# Altium PCB MCX_BNC_Adapter.PCBDOC
Units mm, origin at the board's own origin, x right, y up, seen from the top; angles counter-clockwise.
Board outline 34 x 94 mm, 2 copper layers (TopLayer, BottomLayer), stack 1.571 mm thick; 24 components, 16 nets, 58 pads, 0 vias.
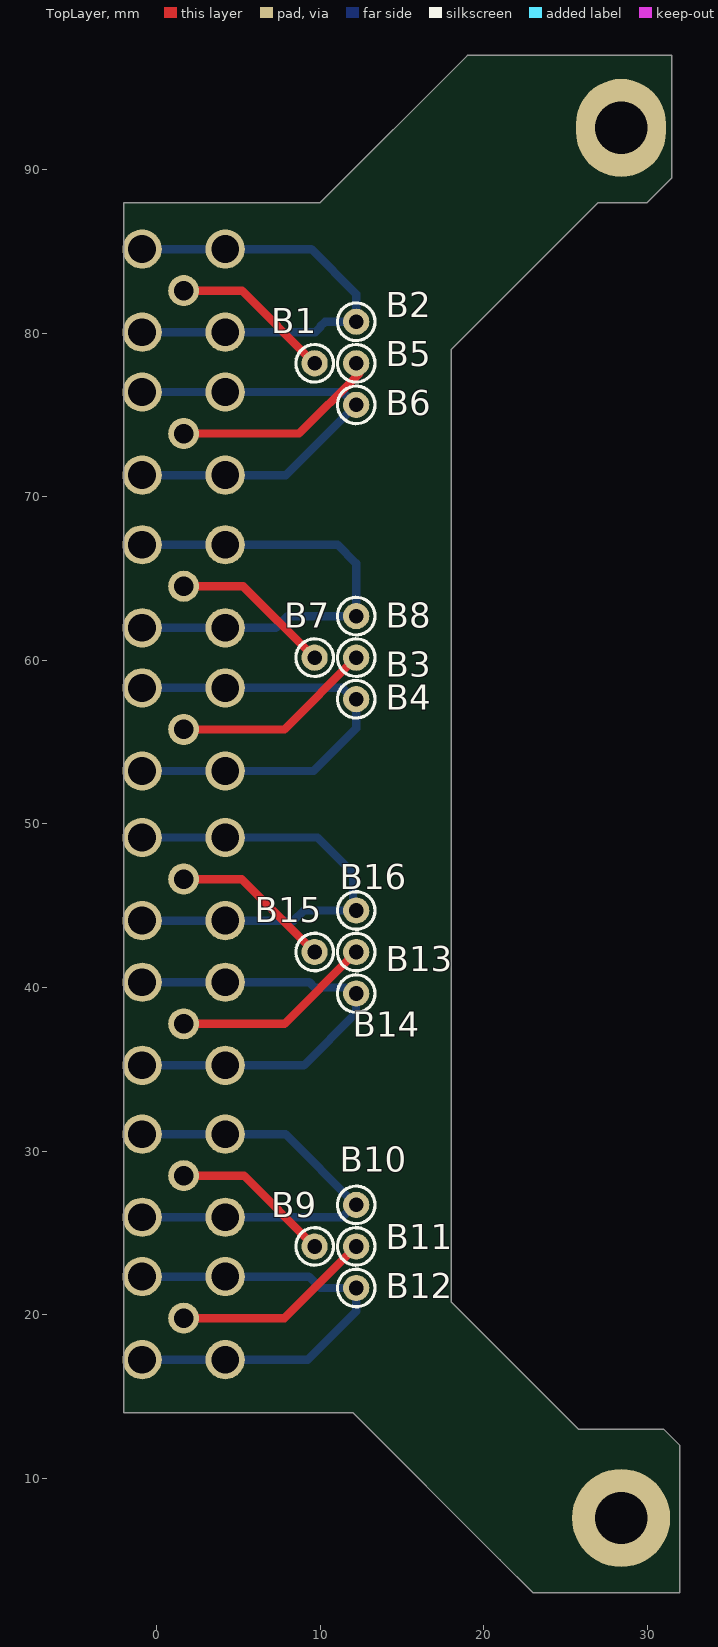
[diagram p0: TopLayer view]
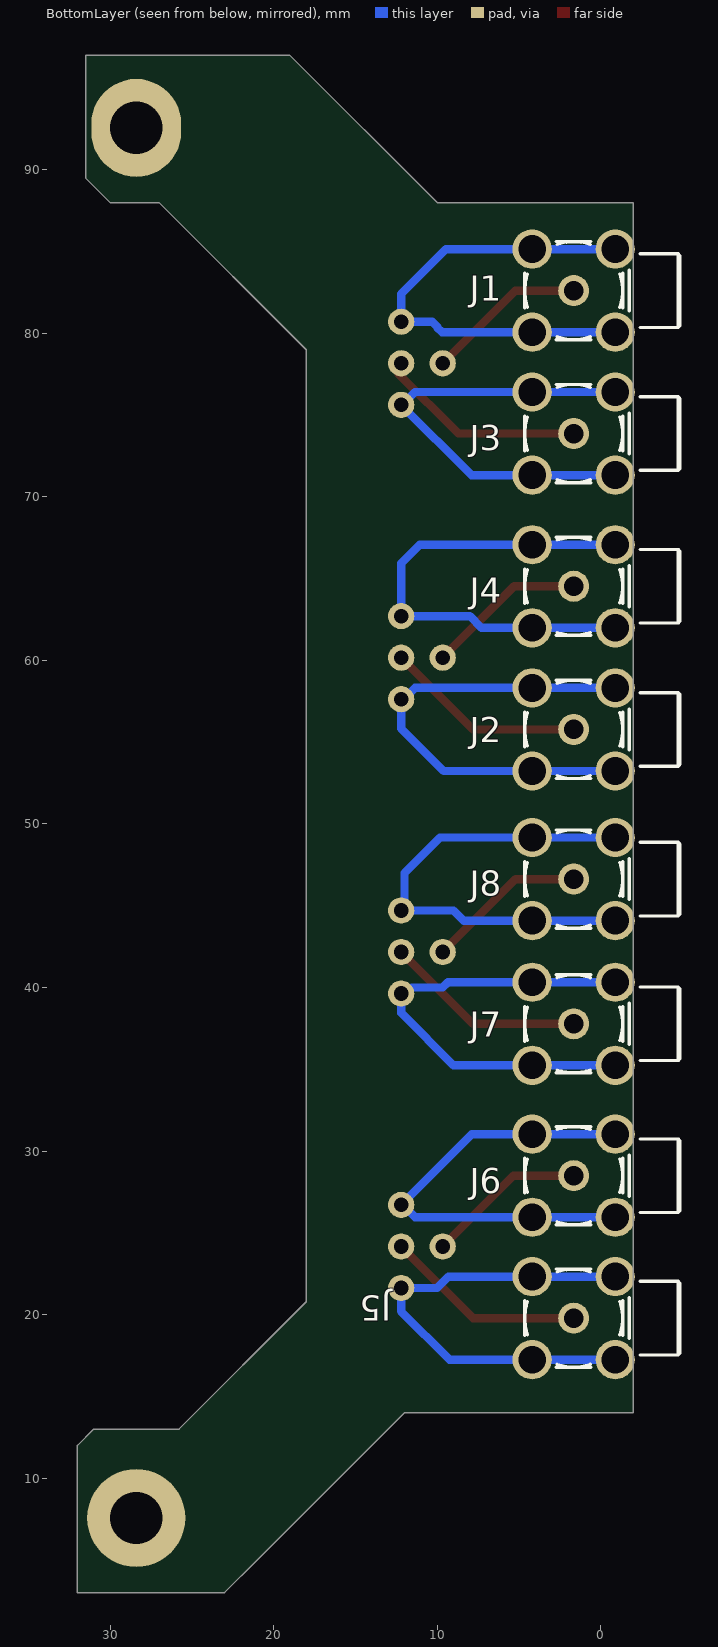
[diagram p1: BottomLayer view, seen from below]
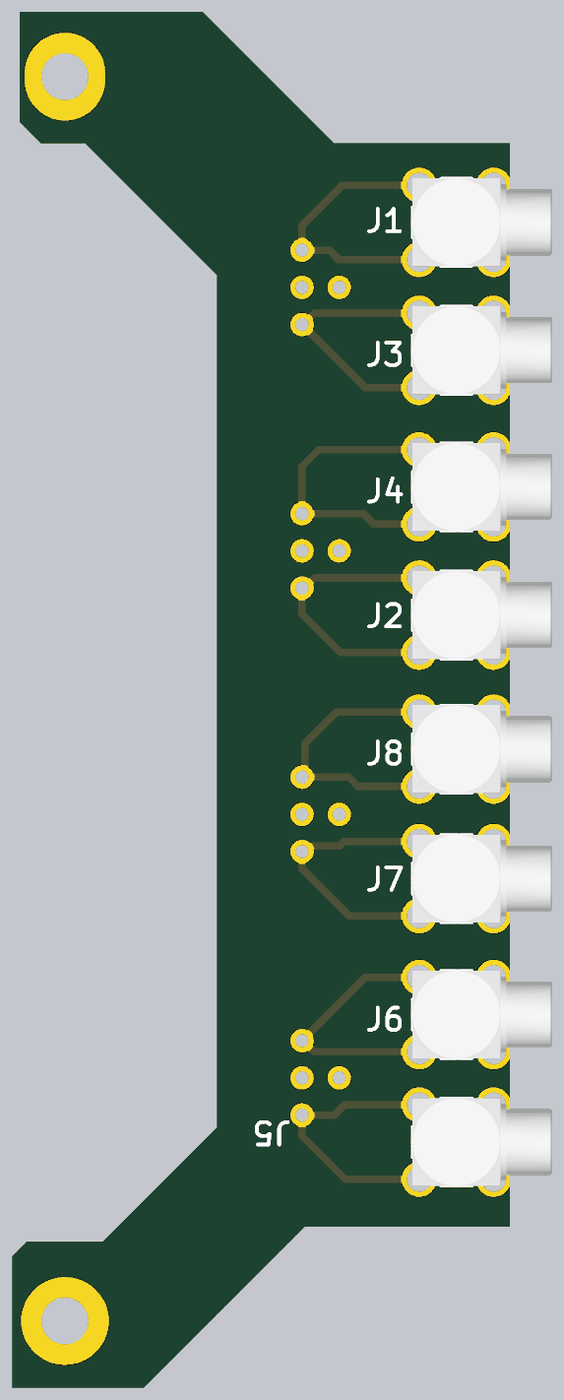
[diagram p2: 3D render of the assembled board from below, using the file's embedded part models]

## Layer stack, top to bottom
TopSolder: solder mask 0.0102, Solder Resist, Dk 3.5
TopLayer: signal copper 0.0356
Dielectric2: dielectric 1.5, FR-4, Dk 4.8
BottomLayer: signal copper 0.0356
BottomSolder: solder mask 0.0102, Solder Resist, Dk 3.5

## Board outline
-2,14 12,14 21,5 23,3 32,3 32,12 31,13 25.783,13 18,20.783 18,79 27,88 30,88 31.5,89.5 31.5,97 19,97 10,88 -2,88

## Design rules (kind name [scope] priority, off if disabled: settings)
Clearance Clearance_DIFF [(InDifferentialPairClass('All Differential Pairs')and IsTrack ) vs (InDifferentialPairClass('All Differential Pairs') and IsTrack  )] p1 off: gap=0.508 ignorepadtopadclearanceinfootprint=FALSE except(0: Arc-Hole Track-Hole SMDPad-Hole THPad-Hole Via-Hole Fill-Hole Poly-Hole Region-Hole Text-Hole; 0.127: SMDPad-SMDPad SMDPad-THPad SMDPad-Via SMDPad-Fill SMDPad-Poly SMDPad-Region SMDPad-Text THPad-THPad THPad-Via THPad-Fill THPad-Poly THPad-Region THPad-Text Via-Via Via-Fill Via-Poly Via-Region Via-Text)
Clearance [All] p2: gap=0.127 ignorepadtopadclearanceinfootprint=FALSE except(0: Arc-Hole Track-Hole SMDPad-Hole THPad-Hole Via-Hole Fill-Hole Poly-Hole Region-Hole Text-Hole; 0.381: Arc-Poly Track-Poly SMDPad-Poly THPad-Poly Via-Poly Fill-Poly Poly-Poly)
ComponentClearance [All] p1: gap=0 collisioncheckmode=3 verticalgap=2540 showdistances=FALSE
DiffPairsRouting [All] p1: maxlimit=0.152 minlimit=0.127 mostfreqgap=0.152 toplayer_minwidth=0.127 toplayer_maxwidth=0.152 toplayer_prefwidth=0.152 bottomlayer_minwidth=0.127 bottomlayer_maxwidth=0.152 bottomlayer_prefwidth=0.152 maxuncoupledlength=12.7
FabricationTestPointUsage TestPointUsage [All] p1: valid=0 allowmultiple=FALSE
FabricationTestpoint Testpoint [All] p1: side=3 testpointundercomponent=TRUE minsize=1.016 maxsize=2.54 preferedsize=1.524 minholesize=0.508 maxholesize=1.016 preferedholesize=0.813 testpointgrid=0.025 allowsidetop=TRUE allowsidebottom=TRUE usegrid=TRUE gridtolerance=0
Height [All] p1: minheight=0 maxheight=40 prefheight=40
HoleSize [All] p1: absolutevalues=TRUE maxlimit=3.81 minlimit=0.025 maxpercent=80.000 minpercent=20.000
HoleToHoleClearance [All] p1: gap=0.025 allowstackedmicrovias=TRUE
MinimumSolderMaskSliver [All] p1: minsoldermaskwidth=0
PlaneClearance [All] p1: clearance=0.2
PlaneConnect [All] p1: planeconnectstyle=Direct reliefexpansion=0.508 reliefentries=4 reliefconductorwidth=0.254 reliefairgap=0.254
PolygonConnect PolygonConnect_pad [(InPadClass('All Pads'))] p1: connectstyle=Relief reliefconductorwidth=0.254 reliefentries=4 polygonreliefangle="90 Angle" airgapwidth=0.254
PolygonConnect [All] p2: connectstyle=Direct reliefconductorwidth=0.254 reliefentries=4 polygonreliefangle="45 Angle" airgapwidth=0.254
RoomDefinition MCX_BNC_Adapter [InComponentClass('MCX_BNC_Adapter')] p1: confinementstyle=ConfineIn formatcopy=TRUE lockcomponents=FALSE outline 32.78,4.594 39,4.594 39,10.594 32.78,10.594
RoutingVias [All] p1: holewidth=0.2 width=0.5 viastyle="Through Hole" minholewidth=0.2 minwidth=0.5 maxholewidth=0.711 maxwidth=1.27
SilkToSilkClearance [All] p1: silktosilkclearance=0
SilkToSolderMaskClearance SilkscreenOverComponentPads [IsPad] p1: minsilkscreentomaskgap=0 clearancetoexposedcopper=TRUE
SolderMaskExpansion [All] p1: expansion=0.051 istentingtop=FALSE
ViasUnderSMD [All] p1: allowed=FALSE
Width [All] p1: maxlimit=1.27 minlimit=0.127 preferedwidth=0.127
18 further rules are at their usual default settings.

## Components (designator, comment, footprint, x,y, rotation, side; value= is the part's Value field where it differs from the comment)
B1 "Plated Hole" c160h90 9.66,78.171 r0 top
B2 "Plated Hole" c160h90 12.2,80.711 r0 top
B3 "Plated Hole" c160h90 12.2,60.17 r0 top
B4 "Plated Hole" c160h90 12.2,57.63 r0 top
B5 "Plated Hole" c160h90 12.2,78.171 r0 top
B6 "Plated Hole" c160h90 12.2,75.631 r0 top
B7 "Plated Hole" c160h90 9.66,60.17 r0 top
B8 "Plated Hole" c160h90 12.2,62.71 r0 top
B9 "Plated Hole" c160h90 9.66,24.17 r0 top
B10 "Plated Hole" c160h90 12.2,26.71 r0 top
B11 "Plated Hole" c160h90 12.2,24.17 r0 top
B12 "Plated Hole" c160h90 12.2,21.63 r0 top
B13 "Plated Hole" c160h90 12.2,42.17 r0 top
B14 "Plated Hole" c160h90 12.2,39.63 r0 top
B15 "Plated Hole" c160h90 9.66,42.17 r0 top
B16 "Plated Hole" c160h90 12.2,44.71 r0 top
J1 "MCX" AMPHENOL_919-383J-51A 1.651,82.613 r180 bottom
J2 "MCX" AMPHENOL_919-383J-51A 1.651,55.783 r180 bottom
J3 "MCX" AMPHENOL_919-383J-51A 1.651,73.873 r180 bottom
J4 "MCX" AMPHENOL_919-383J-51A 1.651,64.537 r180 bottom
J5 "MCX" AMPHENOL_919-383J-51A 1.651,28.495 r180 bottom
J6 "MCX" AMPHENOL_919-383J-51A 1.651,19.783 r180 bottom
J7 "MCX" AMPHENOL_919-383J-51A 1.651,37.783 r180 bottom
J8 "MCX" AMPHENOL_919-383J-51A 1.651,46.631 r180 bottom

## Footprints (in the part's own frame and the unit in brackets; to place one, negate y for a bottom-side part, rotate by r counter-clockwise, add the part's x,y. Pads: shape width x height; smd on the part's side, far side on the other; paste and mask are expansions set on the pad)
AMPHENOL_919-383J-51A [mm] "50 Ohm, RF Connector, MCX Right Angle PCB Receptacle Jack"
  round 1.9 hole 1.2: 1(0,0)
  round 2.4 hole 1.7: 2(-2.54,-2.54) 2(-2.54,2.54) 2(2.54,-2.54) 2(2.54,2.54)
  silkscreen extent -3,-3 6.5,3, body extent -3,-3 6.5,3, height 6
c160h90 [mm] "Plated Through Hole: Hole Dia.=0.9mm Pad Dia.=1.6mm, IPC-7251 Level A"
  round 1.6 hole 0.9: 1(0,0)
  silkscreen extent -1.15,-1.15 1.15,1.15

## Part data
B1 B2 B3 B4 B5 B6 B7 B8 B9 B10 B11 B12 B13 B14 B15 B16: library part PLATED_HOLE0.9_PAD1.6, "Single Terminal Socket", Author="CERN DEM JLC", ComponentHeight=0mm, Component Type="Standard (No BOM)", CreateDate=11.05.2017, Family="Plated Hole", HelpURL=Undefined, LatestRevisionDate=11.05.2017, Mounted=No, PackageDescription="Plated Through Hole: Hole Dia.=0.9mm Pad Dia.=1.6mm, IPC-7251 Level A", Part Description="Plated Through Hole: Hole Dia.=0.9mm Pad Dia.=1.6mm, IPC-7251 Level A", Part Number=PLATED_HOLE0.9_PAD1.6, Pin Count=1, Sense=No, SMD=No, Socket=No, Status=None
J1 J2 J3 J4 J5 J6 J7 J8: library part AMPHENOL_919-383J-51A, Manufacturer=AMPHENOL, Manufacturer Part Number=919-383J-51A, Author="CERN DEM BC", ComponentHeight=6mm, Component Type=Standard, CreateDate=31.01.2019, Family=MCX, HelpURL=\\cern.ch\dfs\Applications\Altium\Datasheets\AMPHENOL_919-383J-51A.pdf, LatestRevisionDate=31.01.2019, Mounted=Yes, Part Description="50 Ohm, RF Connector, MCX Right Angle PCB Receptacle Jack", Part Number=AMPHENOL_919-383J-51A, Pin Count=5, PressFit=No, Sense=No, SMD=No, Socket=No, Status=None

## Free pads (board coordinates)
  oval 5.5x6 hole 3.2: 2(28.4,92.564)
  round 6 hole 3.2: 3(28.4,7.564)

## Nets (pads, with @x,y where several pads share a name; then routed paths per layer and width w, separated by ;. In a path a pad name is that pad's centre, name@x,y a point inside that pad or via, vN(x,y) a via of type N, cw(c..) or ccw(c..) an arc to the next point about the centre after c; other vN are vias at no path point)
NetB1_1: B1.1 J1.1 | length 9.8
  TopLayer w0.508: J1.1 5.218,82.613 B1.1
NetB2_1: B2.1 J1.2 | length 29.3
  BottomLayer w0.508: J1.2@-0.889,80.073 4.191,80.073 9.702,80.073 10,80.37 10,80.413 10.298,80.711 B2.1 12.2,82.413 9.46,85.153 4.191,85.153 J1.2@-0.889,85.153
NetB3_1: B3.1 J2.1 | length 12.4
  TopLayer w0.508: J2.1 7.813,55.783 B3.1
NetB4_1: B4.1 J2.2 | length 29.3
  BottomLayer w0.508: J2.2@-0.889,53.243 4.191,53.243 9.599,53.243 12.2,55.844 B4.1 12.049,57.63 11.356,58.323 4.191,58.323 J2.2@-0.889,58.323
NetB5_1: B5.1 J3.1 | length 13
  TopLayer w0.508: J3.1 8.702,73.873 12.39,77.56 12.39,77.981 B5.1
NetB6_1: B6.1 J3.2 | length 28.3
  BottomLayer w0.508: J3.2@-0.889,71.333 4.191,71.333 7.902,71.333 B6.1 12.139,75.631 11.356,76.413 4.191,76.413 J3.2@-0.889,76.413
NetB7_1: B7.1 J4.1 | length 9.8
  TopLayer w0.508: J4.1 5.293,64.537 B7.1
NetB8_1: B8.1 J4.2 | length 30.2
  BottomLayer w0.508: J4.2@-0.889,61.997 4.191,61.997 7.287,61.997 8,62.71 B8.1 12.2,65.939 11.061,67.077 4.191,67.077 J4.2@-0.889,67.077
NetB9_1: B9.1 J5.1 | length 9.8
  TopLayer w0.508: J5.1 5.335,28.495 B9.1
NetB10_1: B10.1 J5.2 | length 28.3
  BottomLayer w0.508: J5.2@-0.889,25.955 4.191,25.955 11.356,25.955 12.112,26.71 B10.1 7.875,31.035 4.191,31.035 J5.2@-0.889,31.035
NetB11_1: B11.1 J6.1 | length 12.4
  TopLayer w0.508: J6.1 7.813,19.783 B11.1
NetB12_1: B12.1 J6.2 | length 29.1
  BottomLayer w0.508: J6.2@-0.889,17.243 4.191,17.243 9.243,17.243 12.2,20.2 B12.1 10,21.63 9.307,22.323 4.191,22.323 J6.2@-0.889,22.323
NetB13_1: B13.1 J7.1 | length 12.4
  TopLayer w0.508: J7.1 7.813,37.783 B13.1
NetB14_1: B14.1 J7.2 | length 29
  BottomLayer w0.508: J7.2@-0.889,35.243 4.191,35.243 8.995,35.243 12.194,38.443 12.194,39.625 B14.1 11.904,39.63 11.535,40 9.66,40 9.337,40.323 4.191,40.323 J7.2@-0.889,40.323
NetB15_1: B15.1 J8.1 | length 9.9
  TopLayer w0.508: J8.1 5.2,46.631 B15.1
NetB16_1: B16.1 J8.2 | length 29.5
  BottomLayer w0.508: J8.2@-0.889,44.091 4.191,44.091 8.38,44.091 9,44.71 B16.1 12,44.91 12,47 9.829,49.171 4.191,49.171 J8.2@-0.889,49.171

## Silkscreen, mask and mechanical layers (free items; w line width, h text height)
Mechanical1:
  lines w0.254: -2,14 12,14 21,5 23,3 32,3 32,12 31,13 25.783,13 18,20.783 18,79 27,88 30,88 31.5,89.5 31.5,90 31.5,97 19,97 10,88 -2,88 -2,14